# EAGLE board alphanewt_v0.6 (EAGLE 8.2.2)
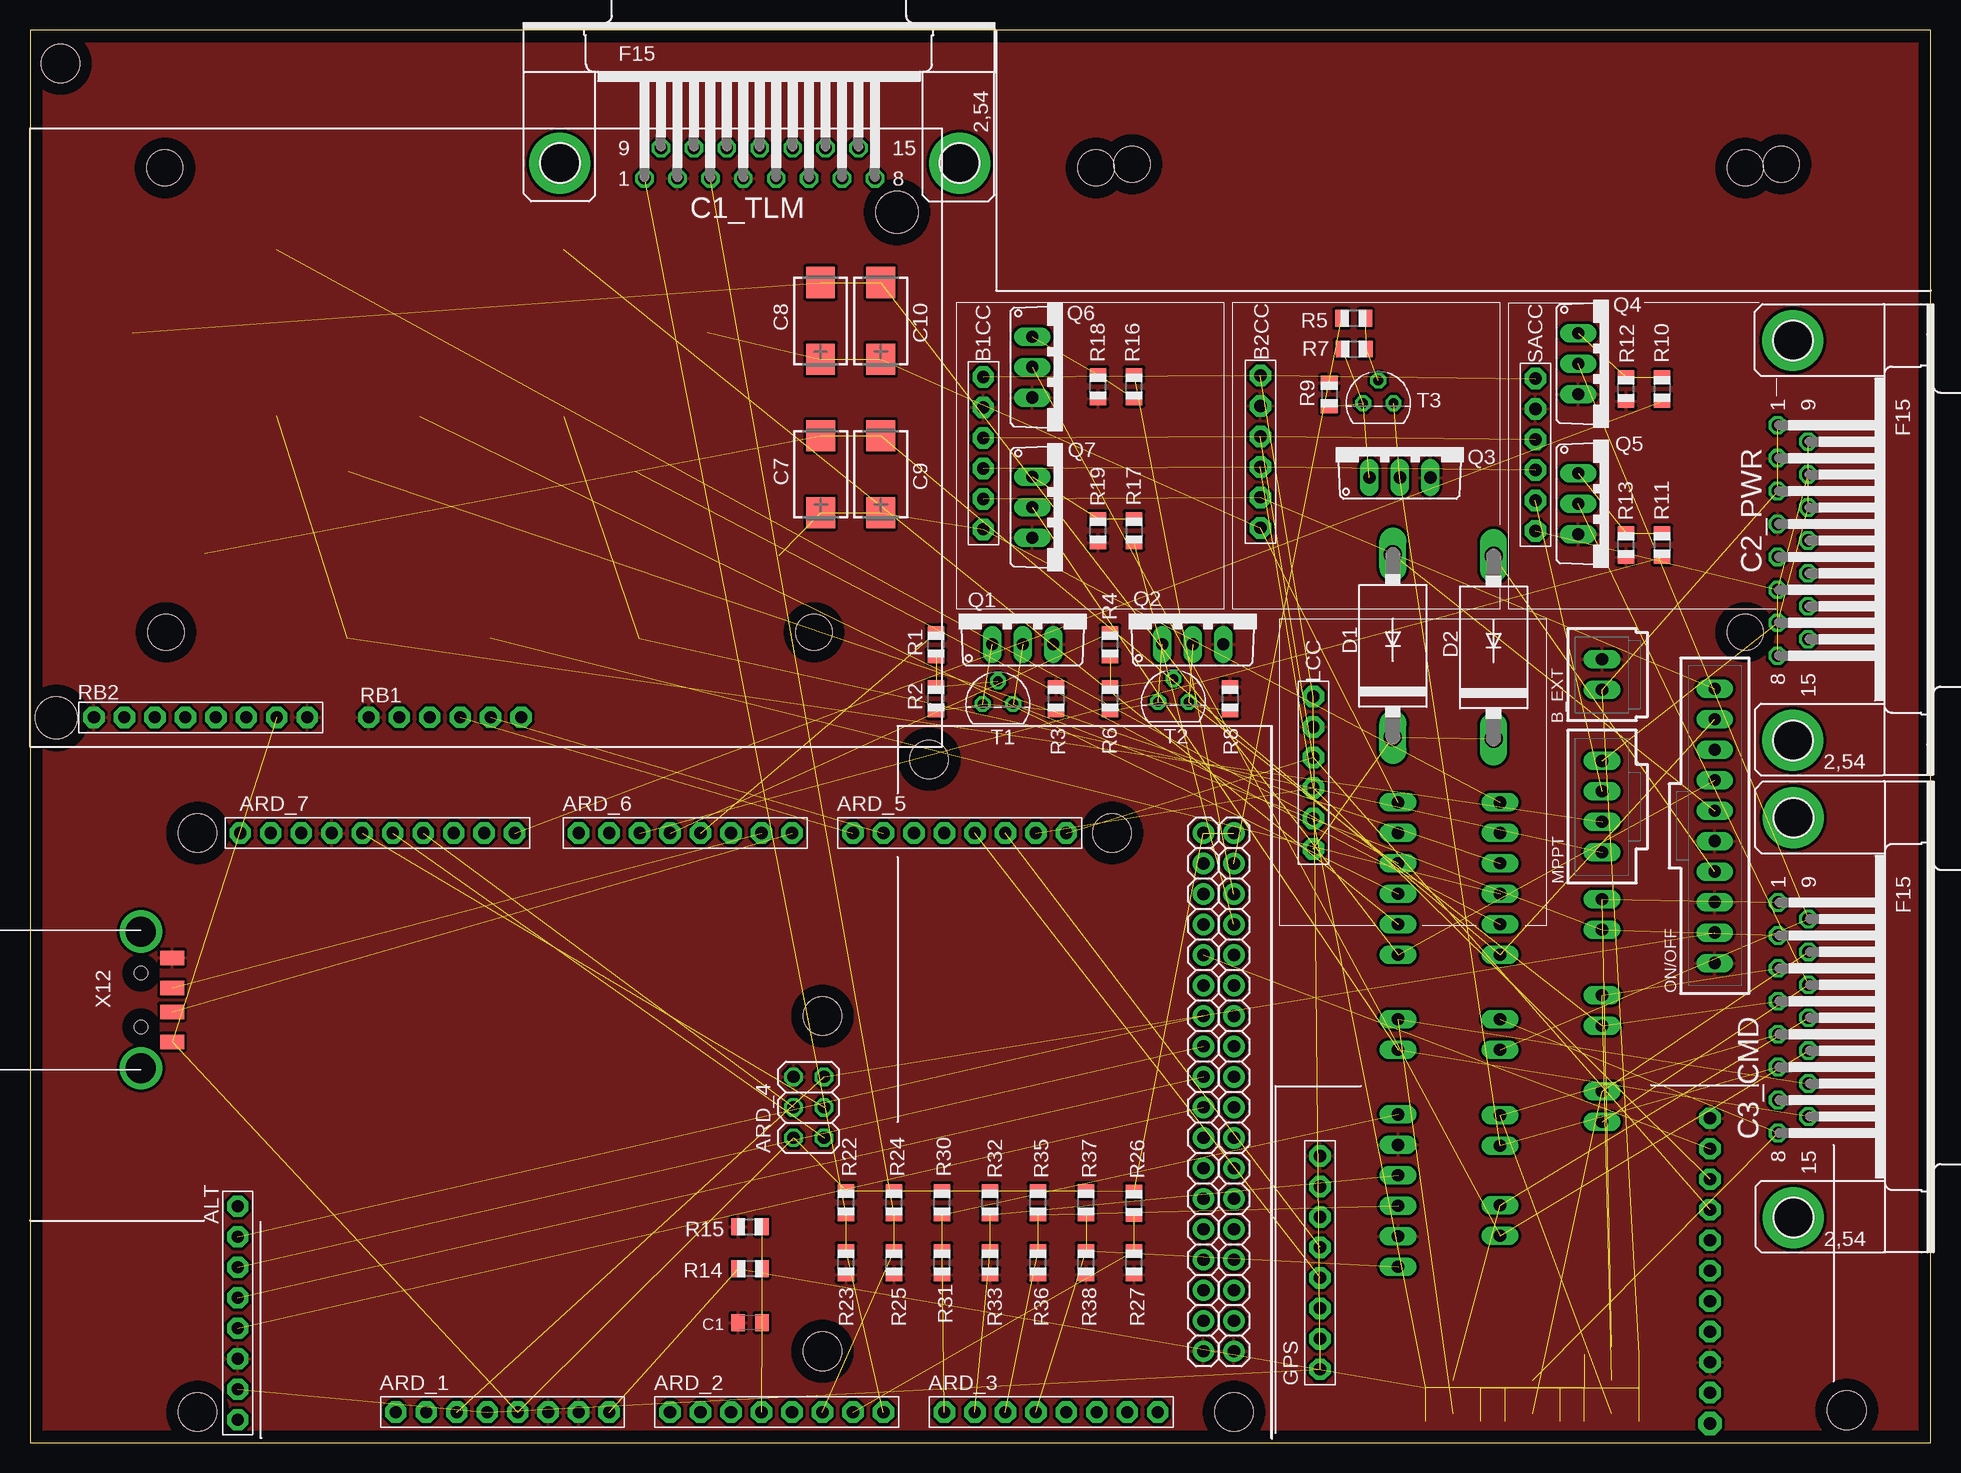
[diagram p0: board, top side]
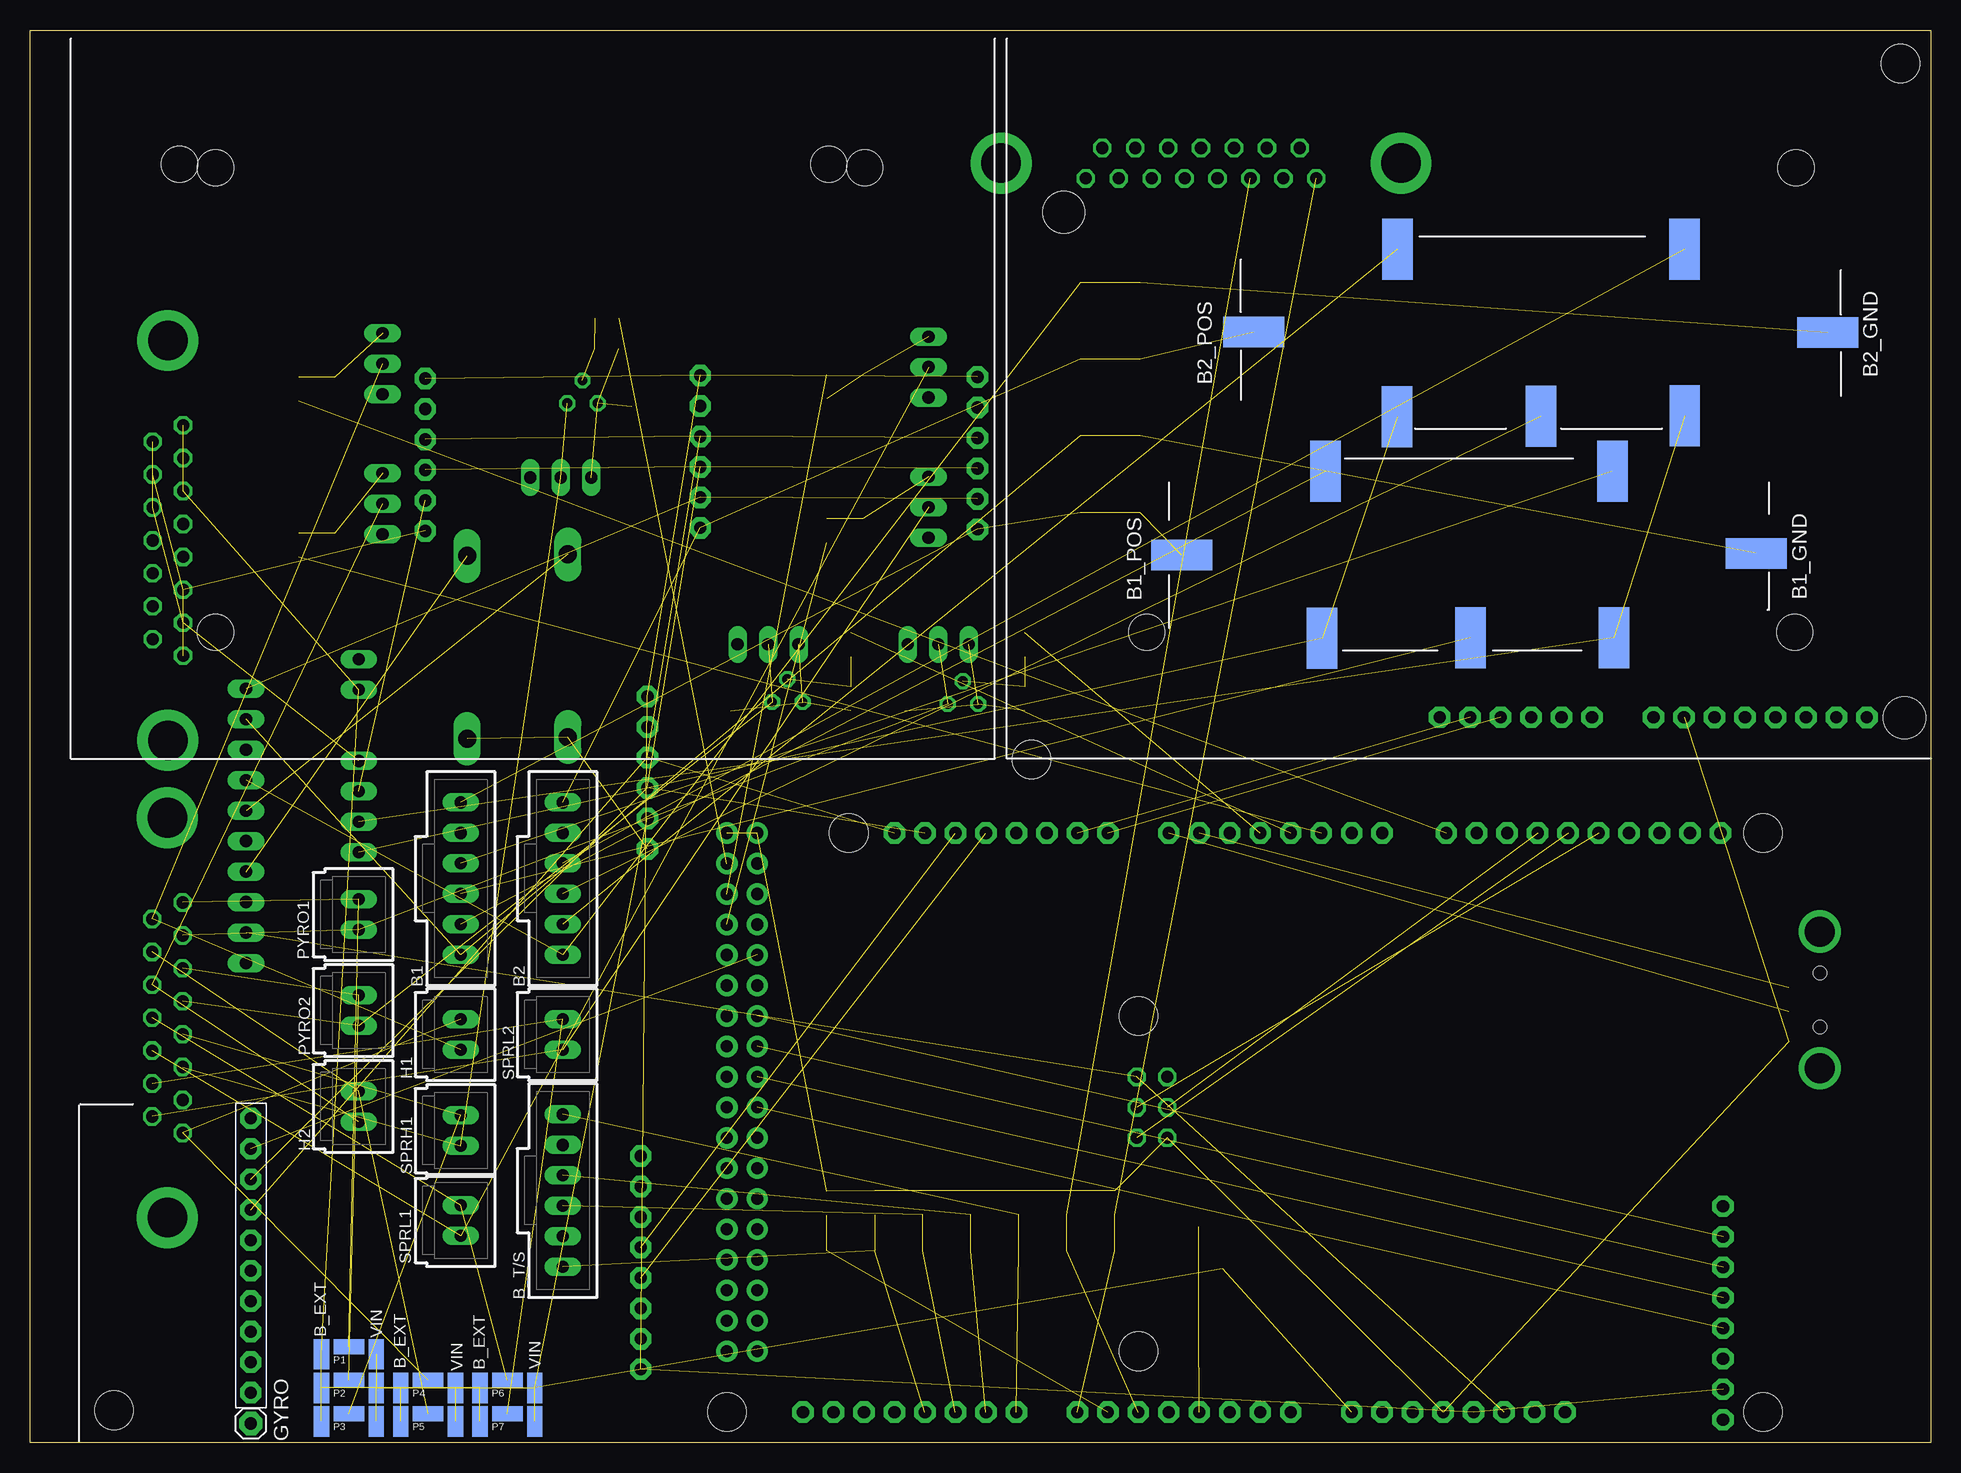
[diagram p1: board, bottom side, seen from below]

Size 158.4 x 117.72 mm. Coordinates in mm from the lower left corner, seen from the top.
Outline: 0,0 158.4,0 158.4,117.72 0,117.72 0,0
Copper layers ((1*2)+(15*16)): Top 0.035mm / dielectric 0.2mm / Route2 0.035mm / dielectric 0.2mm / Route15 0.035mm / dielectric 0.2mm / Bottom 0.035mm
Design rules "default *": minimum track width 6mil, minimum drill 0.35mm, track to track 6mil, track to pad 6mil, pad to pad 6mil, via to via 6mil, smd to smd 6mil, copper to edge 40mil, drill to drill 6mil, minimum pad ring 10mil, minimum via ring 8mil, stop-mask expansion 4mil, vias tented up to drill 0mil, thermal gap 10mil
Net classes: 0 default: width 0.305 mm, drill 0.508 mm, clearance 0.254 mm; 1 PWR: width 0.406 mm, drill 0.508 mm, clearance 0.305 mm
Holes 3.2 mm at 151.4,2.7 13.97,2.54 100.33,2.54 66.04,7.62 66.04,35.56 90.17,50.8 13.97,50.8 2.54,114.94 74.93,56.94
Holes 3.5 mm at 2.18,60.4 72.25,102.54
Holes 3 mm at 11.34,67.53 65.34,67.53 11.24,106.23 142.94,67.53 88.84,106.23 142.94,106.23 91.84,106.53 145.94,106.53

## Footprints (pad centres in the part's own frame; a part is rotated, then mirrored left to right if it is on the bottom)
1X08-BIG = drill 1.016 pad 1.778 octagon: 1 -8.89,0; 2 -6.35,0; 3 -3.81,0; 4 -1.27,0; 5 1.27,0; 6 3.81,0; 7 6.35,0; 8 8.89,0
2X03 = drill 1.016 octagon: 1 -2.54,-1.27; 2 -2.54,1.27; 3 0,-1.27; 4 0,1.27; 5 2.54,-1.27; 6 2.54,1.27
1X10-BIG = drill 1.016 pad 1.778 octagon: 1 -11.43,0; 2 -8.89,0; 3 -6.35,0; 4 -3.81,0; 5 -1.27,0; 6 1.27,0; 7 3.81,0; 8 6.35,0; 9 8.89,0; 10 11.43,0
1X18-BIG = drill 1.016 pad 1.778: 1 -21.59,0; 2 -19.05,0; 3 -16.51,0; 4 -13.97,0; 5 -11.43,0; 6 -8.89,0; 7 -6.35,0; 8 -3.81,0; 9 -1.27,0; 10 1.27,0; 11 3.81,0; 12 6.35,0; 13 8.89,0; 14 11.43,0; 15 13.97,0; 16 16.51,0; 17 19.05,0; 18 21.59,0
70543-06 = drill 1.016 long: 1 -6.35,0; 2 -3.81,0; 3 -1.27,0; 4 1.27,0; 5 3.81,0; 6 6.35,0
SMD2,54-5,08 = smd 2.54 x 5.08: 1 0,0
1X06-BIG = drill 1.016 pad 1.778 octagon: 1 -6.35,0; 2 -3.81,0; 3 -1.27,0; 4 1.27,0; 5 3.81,0; 6 6.35,0
70543-02 = drill 1.016 long: 1 -1.27,0; 2 1.27,0
C0805K = smd 1.1 x 1.4: 1 -1,0; 2 1,0
F15HP = drill 1.016 octagon: 1 -9.601,-1.27; 2 -6.858,-1.27; 3 -4.115,-1.27; 4 -1.372,-1.27; 5 1.372,-1.27; 6 4.115,-1.27; 7 6.858,-1.27; 8 9.601,-1.27; 9 -8.23,1.27; 10 -5.486,1.27; 11 -2.743,1.27; 12 0,1.27; 13 2.743,1.27; 14 5.486,1.27; 15 8.23,1.27 | drill 3.302 pad 5.08: G1 -16.662,0; G2 16.662,0
CT7343 = smd 2.6 x 2.4: + 3.2,0; - -3.2,0
DO201-15 = drill 1.499 long: A 7.62,0; C -7.62,0
1X01 = drill 1.016 pad 1.93 octagon: 1 0,0
70543-04 = drill 1.016 long: 1 -3.81,0; 2 -1.27,0; 3 1.27,0; 4 3.81,0
70543-10 = drill 1.016 long: 1 -11.43,0; 2 -8.89,0; 3 -6.35,0; 4 -3.81,0; 5 -1.27,0; 6 1.27,0; 7 3.81,0; 8 6.35,0; 9 8.89,0; 10 11.43,0
SMD1,27-2,54 = smd 1.27 x 2.54: 1 0,0
TO220AV = drill 1.016 long: B -2.54,-2.54; C 0,-2.54; E 2.54,-2.54
R0805 = smd 1.1 x 1.4: 1 -1,0; 2 1,0
1X06-CLEANBIG = drill 1.016 pad 1.778 octagon: 1 -6.35,0; 2 -3.81,0; 3 -1.27,0; 4 1.27,0; 5 3.81,0; 6 6.35,0
TO92 = drill 0.813 octagon: 1 1.27,0; 2 0,1.905; 3 -1.27,0
MOLEX_480371000 = smd 1.2 x 2: 1 3.5,2.6; 2 1,2.6; 3 -1,2.6; 4 -3.5,2.6 | drill 2.5: M1 -5.7,0; M2 5.7,0 | hole 1.1: -2.25,0; 2.25,0

## Placement (x,y rotation side)
ALT  [1X08-BIG]  17.31,10.8 90 top
ARD_1  [1X08-BIG]  39.37,2.54 0 top
ARD_2  [1X08-BIG]  62.23,2.54 0 top
ARD_3  [1X08-BIG]  85.09,2.54 0 top
ARD_4  [2X03]  64.9,27.94 90 top
ARD_5  [1X08-BIG]  77.47,50.8 0 top
ARD_6  [1X08-BIG]  54.61,50.8 0 top
ARD_7  PINHD-1X10  [1X10-BIG]  28.96,50.8 0 top
ARD_8  [1X18-BIG]  97.79,29.21 270 top
ARD_9  [1X18-BIG]  100.33,29.21 270 top
B1  C-GRID-06-70543  [70543-06]  122.5,47 270 bottom
B1_CELL_1  [SMD2,54-5,08]  50.44,80.94 0 bottom
B1_CELL_2  [SMD2,54-5,08]  38.37,67.06 0 bottom
B1_CELL_3  [SMD2,54-5,08]  26.53,80.96 0 bottom
B1_GND  [SMD2,54-5,08]  14.55,74.1 270 bottom
B1_IN_NEG  [SMD2,54-5,08]  26.4,67.09 0 bottom
B1_IN_POS  [SMD2,54-5,08]  50.72,67.04 0 bottom
B1_POS  [SMD2,54-5,08]  62.42,73.97 270 bottom
B1CC  [1X06-BIG]  79.44,82.45 270 top
B2  C-GRID-06-70543  [70543-06]  114,47 270 bottom
B2_CELL_1  [SMD2,54-5,08]  44.44,99.44 0 bottom
B2_CELL_2  [SMD2,54-5,08]  32.48,85.54 0 bottom
B2_GND  [SMD2,54-5,08]  8.58,92.51 270 bottom
B2_IN_NEG  [SMD2,54-5,08]  20.5,85.58 0 bottom
B2_IN_POS  [SMD2,54-5,08]  44.48,85.5 0 bottom
B2_POS  [SMD2,54-5,08]  56.42,92.54 270 bottom
B2CC  [1X06-BIG]  102.54,82.58 270 top
B3_CELL_3  [SMD2,54-5,08]  20.51,99.44 0 bottom
B_EXT  C-GRID-02-70543  [70543-02]  131,64 90 top
B_T/S  C-GRID-06-70543  [70543-06]  114,21 270 bottom
C1  4.7uF  [C0805K]  60,10 180 top
C1_TLM  [F15HP]  60.81,106.62 0 top
C2_PWR  [F15HP]  146.91,75.18 270 top
C3_CMD  [F15HP]  146.95,35.41 270 top
C7  330uF  [CT7343]  65.9,80.7 270 top
C8  330uF  [CT7343]  65.87,93.48 270 top
C9  330uF  [CT7343]  70.9,80.7 270 top
C10  330uF  [CT7343]  70.9,93.48 270 top
D1  1N5400  [DO201-15]  113.57,66.4 90 top
D2  1N5400  [DO201-15]  121.97,66.28 90 top
GPS  [1X08-BIG]  107.5,15 90 top
GYRO  PINHD-1X10  [1X10-BIG]  140,15.6 270 bottom
GYRO_2  [1X01]  140,1.6 180 bottom
H1  C-GRID-02-70543  [70543-02]  122.5,34 270 bottom
H2  C-GRID-02-70543  [70543-02]  131,28 270 bottom
LCC  [1X06-BIG]  106.95,55.83 270 top
MPPT  C-GRID-04-70543  [70543-04]  131,53 90 top
ON/OFF  C-GRID-10-70543  [70543-10]  140.4,51.4 270 top
PEXT1  [SMD1,27-2,54]  134.11,7.37 0 bottom
PEXT2  [SMD1,27-2,54]  134.11,4.57 0 bottom
PEXT3  [SMD1,27-2,54]  134.11,1.78 0 bottom
PEXT4  [SMD1,27-2,54]  127.51,4.57 0 bottom
PEXT5  [SMD1,27-2,54]  127.51,1.78 180 bottom
PEXT6  [SMD1,27-2,54]  120.9,4.57 0 bottom
PEXT7  [SMD1,27-2,54]  120.9,1.78 0 bottom
PO1  [SMD1,27-2,54]  131.83,8 90 bottom
PO2  [SMD1,27-2,54]  131.83,5.21 270 bottom
PO3  [SMD1,27-2,54]  131.83,2.41 270 bottom
PO4  [SMD1,27-2,54]  125.22,5.21 270 bottom
PO5  [SMD1,27-2,54]  125.22,2.41 270 bottom
PO6  [SMD1,27-2,54]  118.62,5.21 270 bottom
PO7  [SMD1,27-2,54]  118.62,2.41 270 bottom
PVIN1  [SMD1,27-2,54]  129.54,7.37 180 bottom
PVIN2  [SMD1,27-2,54]  129.54,4.57 0 bottom
PVIN3  [SMD1,27-2,54]  129.54,1.78 0 bottom
PVIN4  [SMD1,27-2,54]  122.94,4.57 0 bottom
PVIN5  [SMD1,27-2,54]  122.94,1.78 180 bottom
PVIN6  [SMD1,27-2,54]  116.33,4.57 0 bottom
PVIN7  [SMD1,27-2,54]  116.33,1.78 0 bottom
PYRO1  C-GRID-02-70543  [70543-02]  131,44 270 bottom
PYRO2  C-GRID-02-70543  [70543-02]  131,36 270 bottom
Q1  TIP41C  [TO220AV]  82.72,69.06 0 top
Q2  TIP41C  [TO220AV]  96.9,69.06 0 top
Q3  TIP41C  [TO220AV]  114.16,82.96 0 top
Q4  TIP41C  [TO220AV]  131.56,89.91 270 top
Q5  TIP41C  [TO220AV]  131.56,78.23 270 top
Q6  TIP41C  [TO220AV]  86.06,89.63 270 top
Q7  TIP41C  [TO220AV]  86.06,77.95 270 top
R1  150  [R0805]  75.5,66.5 90 top
R2  150  [R0805]  75.5,62 90 top
R3  150  [R0805]  85.5,62 270 top
R4  150  [R0805]  90,66.5 90 top
R5  150  [R0805]  110.3,93.69 180 top
R6  150  [R0805]  90,62 90 top
R7  150  [R0805]  110.34,91.14 0 top
R8  150  [R0805]  100,62 270 top
R9  150  [R0805]  108.28,87.34 270 top
R10  120  [R0805]  136,87.8 270 top
R11  120  [R0805]  136,74.8 270 top
R12  10k  [R0805]  133,87.8 90 top
R13  10k  [R0805]  133,74.8 90 top
R14  1.7M  [R0805]  60,14.5 180 top
R15  470k  [R0805]  60,18 0 top
R16  120  [R0805]  92,88 90 top
R17  120  [R0805]  92,76 270 top
R18  10k  [R0805]  89,88 90 top
R19  10k  [R0805]  89,76 90 top
R22  6800  [R0805]  68,20 90 top
R23  120000  [R0805]  68,15 90 top
R24  6800  [R0805]  72,20 90 top
R25  120000  [R0805]  72,15 90 top
R26  6800  [R0805]  92,19.96 90 top
R27  120000  [R0805]  92,15 90 top
R30  6800  [R0805]  76,20 90 top
R31  120000  [R0805]  76,15 90 top
R32  6800  [R0805]  80,20 90 top
R33  120000  [R0805]  80,15 90 top
R35  6800  [R0805]  84,20 90 top
R36  120000  [R0805]  84,15 90 top
R37  6800  [R0805]  88,20 90 top
R38  120000  [R0805]  88,15 90 top
RB1  [1X06-CLEANBIG]  34.58,60.45 180 top
RB2  [1X08-BIG]  14.22,60.44 180 top
SACC  [1X06-BIG]  125.46,82.33 270 top
SPRH1  C-GRID-02-70543  [70543-02]  122.5,26 270 bottom
SPRL1  C-GRID-02-70543  [70543-02]  122.5,18.5 270 bottom
SPRL2  C-GRID-02-70543  [70543-02]  114,34 270 bottom
T1  2N3904  [TO92]  80.66,61.55 0 top
T2  2N3904  [TO92]  95.29,61.71 0 top
T3  2N3904  [TO92]  112.36,86.61 0 top
X12  USB-A  [MOLEX_480371000]  9.24,36.89 270 top

## Library data of the parts
ALT ARD_1-ARD_3 ARD_5-ARD_9 B1CC B2CC GPS GYRO GYRO_2 LCC RB1 RB2 SACC = adafruit; OC_NEWARK: unknown
ARD_4 = pinhead; OC_NEWARK: unknown
B1 B2 B_T/S = con-molex; MF: MOLEX; MPN: 70543-0005; OC_FARNELL: unknown; OC_NEWARK: 59H2647
B1_CELL_1-B1_CELL_3 B1_GND B1_IN_NEG B1_IN_POS B1_POS B2_CELL_1 B2_CELL_2 B2_GND B2_IN_NEG B2_IN_POS B2_POS B3_CELL_3 PEXT1-PEXT7 PO1-PO7 PVIN1-PVIN7 = wirepad; OC_NEWARK: unknown
B_EXT H1 H2 PYRO1 PYRO2 SPRH1 SPRL1 SPRL2 = con-molex; MF: MOLEX; MPN: 70543-0001; OC_FARNELL: unknown; OC_NEWARK: 59H2645
C1 = adafruit; MPN: C2012X6S1H475K125AC; OC_NEWARK: 95Y0059
C1_TLM C2_PWR C3_CMD = adafruit; MPN: 5504F1-15S-02A-03; OC_NEWARK: 18T0705
C7-C10 = adafruit; MPN: TCN4337M020R0100; OC_NEWARK: 13AC9461
D1 D2 = diode; MPN: 1N5400-E3/54; OC_NEWARK: 05R5997
MPPT = con-molex; MF: MOLEX; MPN: 70543-0038; OC_FARNELL: unknown; OC_NEWARK: 59H2665
ON/OFF = con-molex; MF: MOLEX; MPN: 70543-0009; OC_FARNELL: unknown; OC_NEWARK: 59H2651
Q1-Q7 = transistor-power; MF: FAIRCHILD SEMICONDUCTOR; MPN: TIP41C; OC_NEWARK: 58K2429
R1-R19 R22-R27 R30-R33 R35-R38 = adafruit; MF: VISHAY/DALE; MPN: CRCW120633R2FKEA; OC_NEWARK: 42K4999
T1-T3 = transistor; MF: NTE ELECTRONICS; MPN: 2N3904; OC_NEWARK: 33C8259
X12 = adafruit; MPN: UE27-AC54-10H; OC_NEWARK: 01M3183

## Nets
5V_OUT: RB2.3
+3.3V: ALT.2 ARD_1.4 B1CC.1 B2CC.1 GPS.1 LCC.1 SACC.1
+5V: ARD_1.5 ARD_4.2 ARD_8.1 ARD_9.1 R22.2 R24.2 R26.2 R30.2 R32.2 R35.2 R37.2 RB2.2 X12.1
A0: ARD_2.1
A1: ARD_2.2
A2: ARD_2.3
A4: ARD_2.5
ALT_CS: ALT.7 ARD_8.7
ALT_MISO: ALT.5 ARD_8.9
ALT_MOSI: ALT.6 ARD_8.8
ALT_SCK: ALT.4 ARD_8.10
ALT_VIN: ALT.1
AREF: ARD_7.3
B1_CHRG_IN [PWR]: B1.1 B1_POS.1 B1CC.6 C7.+ C9.+
B1_CHRG_OUT [PWR]: B1CC.5 B2CC.5 ON/OFF.1
B1_GND [PWR]: B1.6 B1_GND.1 C7.- C9.- ON/OFF.2
B1_TO_LOAD [PWR]: D1.A ON/OFF.5
B2_CHRG_IN [PWR]: B2.1 B2_POS.1 B2CC.6 C8.+ C10.+
B2_CHRG_OUT [PWR]: ON/OFF.3
B2_GND [PWR]: B2.6 B2_GND.1 C8.- C10.- ON/OFF.4
B2_TO_LOAD [PWR]: D2.A ON/OFF.7
BATT_1_TS1: ARD_3.1 B_T/S.1 R30.1 R31.2
BATT_1_TS2: ARD_3.2 B_T/S.3 R32.1 R33.2
BATT_2_TS1: ARD_3.3 B_T/S.4 R35.1 R36.2
BATT_2_TS2: ARD_3.4 B_T/S.6 R37.1 R38.2
BATT_CHRG_PWR [PWR]: B1_IN_POS.1 B2_IN_POS.1 MPPT.1
BATT_CHRG_PWR_RTN [PWR]: B1_IN_NEG.1 B2_IN_NEG.1 MPPT.2
BATT_EXT_PWR [PWR]: B_EXT.1 C2_PWR.1 C2_PWR.3 PEXT1.1 PEXT2.1 PEXT3.1 PEXT4.1 PEXT5.1 PEXT6.1 PEXT7.1
CANRX: ARD_3.7
CANTX: ARD_3.8
CHIP_SEL: ARD_7.8
CTS: RB1.5
CUTDOWN_1_FIRE: ARD_6.5 R1.2
CUTDOWN_2_FIRE: ARD_6.4 R4.2
D2: ARD_6.6
D6: ARD_6.2
D7: ARD_6.1
D9: ARD_7.9
D22: ARD_8.2
D24: ARD_8.3
D26: ARD_8.4
D29: ARD_9.5
D30: ARD_8.6
D31: ARD_9.6
D33: ARD_9.7
D35: ARD_9.8
D37: ARD_9.9
D39: ARD_9.10
D40: ARD_8.11
D41: ARD_9.11
D42: ARD_8.12
D43: ARD_9.12
D44: ARD_8.13
D45: ARD_9.13
D46: ARD_8.14
D47: ARD_9.14
D48: ARD_8.15
D49: ARD_9.15
D50: ARD_8.16
D51: ARD_9.16
D52: ARD_8.17
D53: ARD_9.17
DAC0: ARD_3.5
DAC1: ARD_3.6
FLT_CMP_TEMP: ARD_2.7 R26.1 R27.2
GND: ALT.3 ARD_1.6 ARD_1.7 ARD_4.6 ARD_7.4 ARD_8.18 ARD_9.18 B1CC.2 B2CC.2 B_EXT.2 B_T/S.2 B_T/S.5 C1.2 C1_TLM.2 C1_TLM.4 C2_PWR.2 C2_PWR.4 GPS.8 GYRO.1 GYRO.9 LCC.2 ON/OFF.6 ON/OFF.8 ON/OFF.10 Q1.E Q2.E Q3.E Q4.E Q5.E Q6.E Q7.E R3.1 R8.1 R9.1 R12.1 R13.1 R15.1 R18.1 R19.1 R23.1 R25.1 R27.1 R31.1 R33.1 R36.1 R38.1 RB1.6 RB2.1 RB2.8 SACC.2 X12.4
GYRO_CIN: GYRO.8
GYRO_COUT: GYRO.7
GYRO_ESC: GYRO.6
GYRO_ESD: GYRO.5
GYRO_FSYNC: GYRO.10
GYRO_INT: GYRO_2.1
GYRO_PWR: ARD_8.5 GYRO.2
HEATER_1_PWR [PWR]: C3_CMD.8 H1.1 PO4.1
HEATER_1_PWR_RTN [PWR]: C3_CMD.9 H1.2 Q4.C
HEATER_2_PWR [PWR]: C3_CMD.10 H2.1 PO5.1
HEATER_2_PWR_RTN [PWR]: C3_CMD.11 H2.2 Q5.C
HEATER_CONTROL_1: ARD_7.10 R10.2
HEATER_CONTROL_2: ARD_6.3 R11.2
IOREF: ARD_1.2
LI_ION: RB2.7
LOAD_IN [PWR]: D1.C D2.C LCC.6
MISO: ARD_4.1 ARD_7.6
MOSI: ARD_4.4 ARD_7.7
N$1: B1.2
N$2: B2.2
N$12: C1_TLM.9
N$13: C1_TLM.10
N$15: R4.1 R6.2 T2.2
N$16: R1.1 R2.2 T1.2
N$18: Q4.B R10.1 R12.2
N$19: Q2.B R6.1 R8.2 T2.3
N$20: C1_TLM.11
N$21: C1_TLM.12
N$22: Q5.B R11.1 R13.2
N$23: Q1.B R2.1 R3.2 T1.3
N$24: Q6.B R16.1 R18.2
N$25: C1_TLM.13
N$26: R5.1 R7.2 T3.2
N$27: Q3.B R7.1 R9.2 T3.3
N$28: C1_TLM.14
N$29 [PWR]: B1.5 B1_CELL_1.1
N$30: C1_TLM.15
N$31: Q7.B R17.1 R19.2
N$33 [PWR]: B1.4 B1_CELL_2.1
N$34 [PWR]: B2.3 B3_CELL_3.1
N$35 [PWR]: B2.4 B2_CELL_2.1
N$36 [PWR]: B2.5 B2_CELL_1.1
N$37 [PWR]: B1.3 B1_CELL_3.1
N$40: C1_TLM.5
N$41: C1_TLM.6
N$42: C1_TLM.7
N$43: C1_TLM.8
N$47: C2_PWR.12
N$48: C2_PWR.13
N$49: C2_PWR.14
N$50: C2_PWR.15
N$55: C2_PWR.5
N$72 [PWR]: C3_CMD.7
NET_AV: RB2.5
ON_OFF: RB2.6
PYRO_1_PWR [PWR]: C3_CMD.1 PO1.1 PYRO1.1
PYRO_1_PWR_RTN [PWR]: C3_CMD.2 PYRO1.2 Q1.C T1.1
PYRO_2_PWR [PWR]: C3_CMD.3 PO2.1 PYRO2.1
PYRO_2_PWR_RTN [PWR]: C3_CMD.4 PYRO2.2 Q2.C T2.1
RESET: ARD_1.3 ARD_4.5 ON/OFF.9
RF_IN: GPS.2
RI: RB2.4
RTS: RB1.1
RX0: ARD_6.8 X12.2
RX1: ARD_5.6 GPS.5
RX2: ARD_5.4
RX3: ARD_5.2 RB1.2
RXB: GPS.7
S/A_PWR_IN [PWR]: C2_PWR.6 C2_PWR.8 C2_PWR.10 SACC.6
S/A_PWR_OUT [PWR]: MPPT.3 SACC.5
S/A_PWR_RTN [PWR]: C2_PWR.7 C2_PWR.9 C2_PWR.11 MPPT.4
SCK: ARD_4.3 ARD_7.5
SCL: ARD_5.8 B1CC.3 B2CC.3 GYRO.4 LCC.3 SACC.3
SCL1: ARD_7.1
SDA: ARD_5.7 B1CC.4 B2CC.4 GYRO.3 LCC.4 SACC.4
SDA1: ARD_7.2
SPARE_1_PWR [PWR]: C3_CMD.12 PO6.1 SPRL1.1
SPARE_1_PWR_RTN [PWR]: C3_CMD.13 Q6.C SPRL1.2
SPARE_2_PWR [PWR]: C3_CMD.14 PO7.1 SPRL2.1
SPARE_2_PWR_RTN [PWR]: C3_CMD.15 Q7.C SPRL2.2
SPARE_HIGH_1_CONTROL: ARD_9.2 R5.2
SPARE_HIGH_1_PWR [PWR]: C3_CMD.5 PO3.1 SPRH1.1
SPARE_HIGH_1_PWR_RTN [PWR]: C3_CMD.6 Q3.C SPRH1.2 T3.1
SPARE_LOW_1_CONTROL: ARD_9.3 R16.2
SPARE_LOW_2_CONTROL: ARD_9.4 R17.2
TEMP_EXT_1: ARD_2.8 C1_TLM.1 R22.1 R23.2
TEMP_EXT_2: ARD_2.6 C1_TLM.3 R24.1 R25.2
TX0: ARD_6.7 X12.3
TX1: ARD_5.5 GPS.4
TX2: ARD_5.3
TX3: ARD_5.1 RB1.3
TXB: GPS.6
UNKNOWN: ARD_1.1
VBAT: GPS.3
VCC_RB: RB1.4
VIN [PWR]: ARD_1.8 LCC.5 PVIN1.1 PVIN2.1 PVIN3.1 PVIN4.1 PVIN5.1 PVIN6.1 PVIN7.1 R14.2
VIN_VOLTAGE_TLM: ARD_2.4 C1.1 R14.1 R15.2

## Tracks (layer width: path | path; a pad name or v marks a point on that pad's centre or on a via)
+3.3V  (6 unrouted)
+5V  (12 unrouted)
ALT_CS  (1 unrouted)
ALT_MISO  (1 unrouted)
ALT_MOSI  (1 unrouted)
ALT_SCK  (1 unrouted)
B1_CHRG_IN  (4 unrouted)
B1_CHRG_OUT  (2 unrouted)
B1_GND  (4 unrouted)
B1_TO_LOAD  (1 unrouted)
B2_CHRG_IN  (4 unrouted)
B2_GND  (4 unrouted)
B2_TO_LOAD  (1 unrouted)
BATT_1_TS1  (3 unrouted)
BATT_1_TS2  (3 unrouted)
BATT_2_TS1  (3 unrouted)
BATT_2_TS2  (3 unrouted)
BATT_CHRG_PWR  (2 unrouted)
BATT_CHRG_PWR_RTN  (2 unrouted)
BATT_EXT_PWR  (9 unrouted)
CUTDOWN_1_FIRE  (1 unrouted)
CUTDOWN_2_FIRE  (1 unrouted)
FLT_CMP_TEMP  (2 unrouted)
GND
  pour Top: 0.1,117.6 0.1,0.1 158.3,0.1 158.3,117.6
GYRO_PWR  (1 unrouted)
HEATER_1_PWR  (2 unrouted)
HEATER_1_PWR_RTN  (2 unrouted)
HEATER_2_PWR  (2 unrouted)
HEATER_2_PWR_RTN  (2 unrouted)
HEATER_CONTROL_1  (1 unrouted)
HEATER_CONTROL_2  (1 unrouted)
LOAD_IN  (2 unrouted)
MISO  (1 unrouted)
MOSI  (1 unrouted)
N$15  (2 unrouted)
N$16  (2 unrouted)
N$18  (2 unrouted)
N$19  (3 unrouted)
N$22  (2 unrouted)
N$23  (3 unrouted)
N$24  (2 unrouted)
N$26  (2 unrouted)
N$27  (3 unrouted)
N$29  (1 unrouted)
N$31  (2 unrouted)
N$33  (1 unrouted)
N$34  (1 unrouted)
N$35  (1 unrouted)
N$36  (1 unrouted)
N$37  (1 unrouted)
PYRO_1_PWR  (2 unrouted)
PYRO_1_PWR_RTN  (3 unrouted)
PYRO_2_PWR  (2 unrouted)
PYRO_2_PWR_RTN  (3 unrouted)
RESET  (2 unrouted)
RX0  (1 unrouted)
RX1  (1 unrouted)
RX3  (1 unrouted)
S/A_PWR_IN  (3 unrouted)
S/A_PWR_OUT  (1 unrouted)
S/A_PWR_RTN  (3 unrouted)
SCK  (1 unrouted)
SCL  (5 unrouted)
SDA  (5 unrouted)
SPARE_1_PWR  (2 unrouted)
SPARE_1_PWR_RTN  (2 unrouted)
SPARE_2_PWR  (2 unrouted)
SPARE_2_PWR_RTN  (2 unrouted)
SPARE_HIGH_1_CONTROL  (1 unrouted)
SPARE_HIGH_1_PWR  (2 unrouted)
SPARE_HIGH_1_PWR_RTN  (3 unrouted)
SPARE_LOW_1_CONTROL  (1 unrouted)
SPARE_LOW_2_CONTROL  (1 unrouted)
TEMP_EXT_1  (3 unrouted)
TEMP_EXT_2  (3 unrouted)
TX0  (1 unrouted)
TX1  (1 unrouted)
TX3  (1 unrouted)
VIN  (9 unrouted)
VIN_VOLTAGE_TLM  (3 unrouted)

## Text on the board
bNames: VIN | B_EXT | P1 | VIN | B_EXT | VIN | B_EXT | GYRO | P6 | P4 | P2 | P7 | P5 | P3